# Altium PCB ADS.PcbDoc
Units mm, origin at the board's own origin, x right, y up, seen from the top; angles counter-clockwise.
Board outline 54.11 x 51.86 mm, 2 copper layers (Top Layer, Bottom Layer); 70 components, 0 nets, 317 pads, 0 vias.
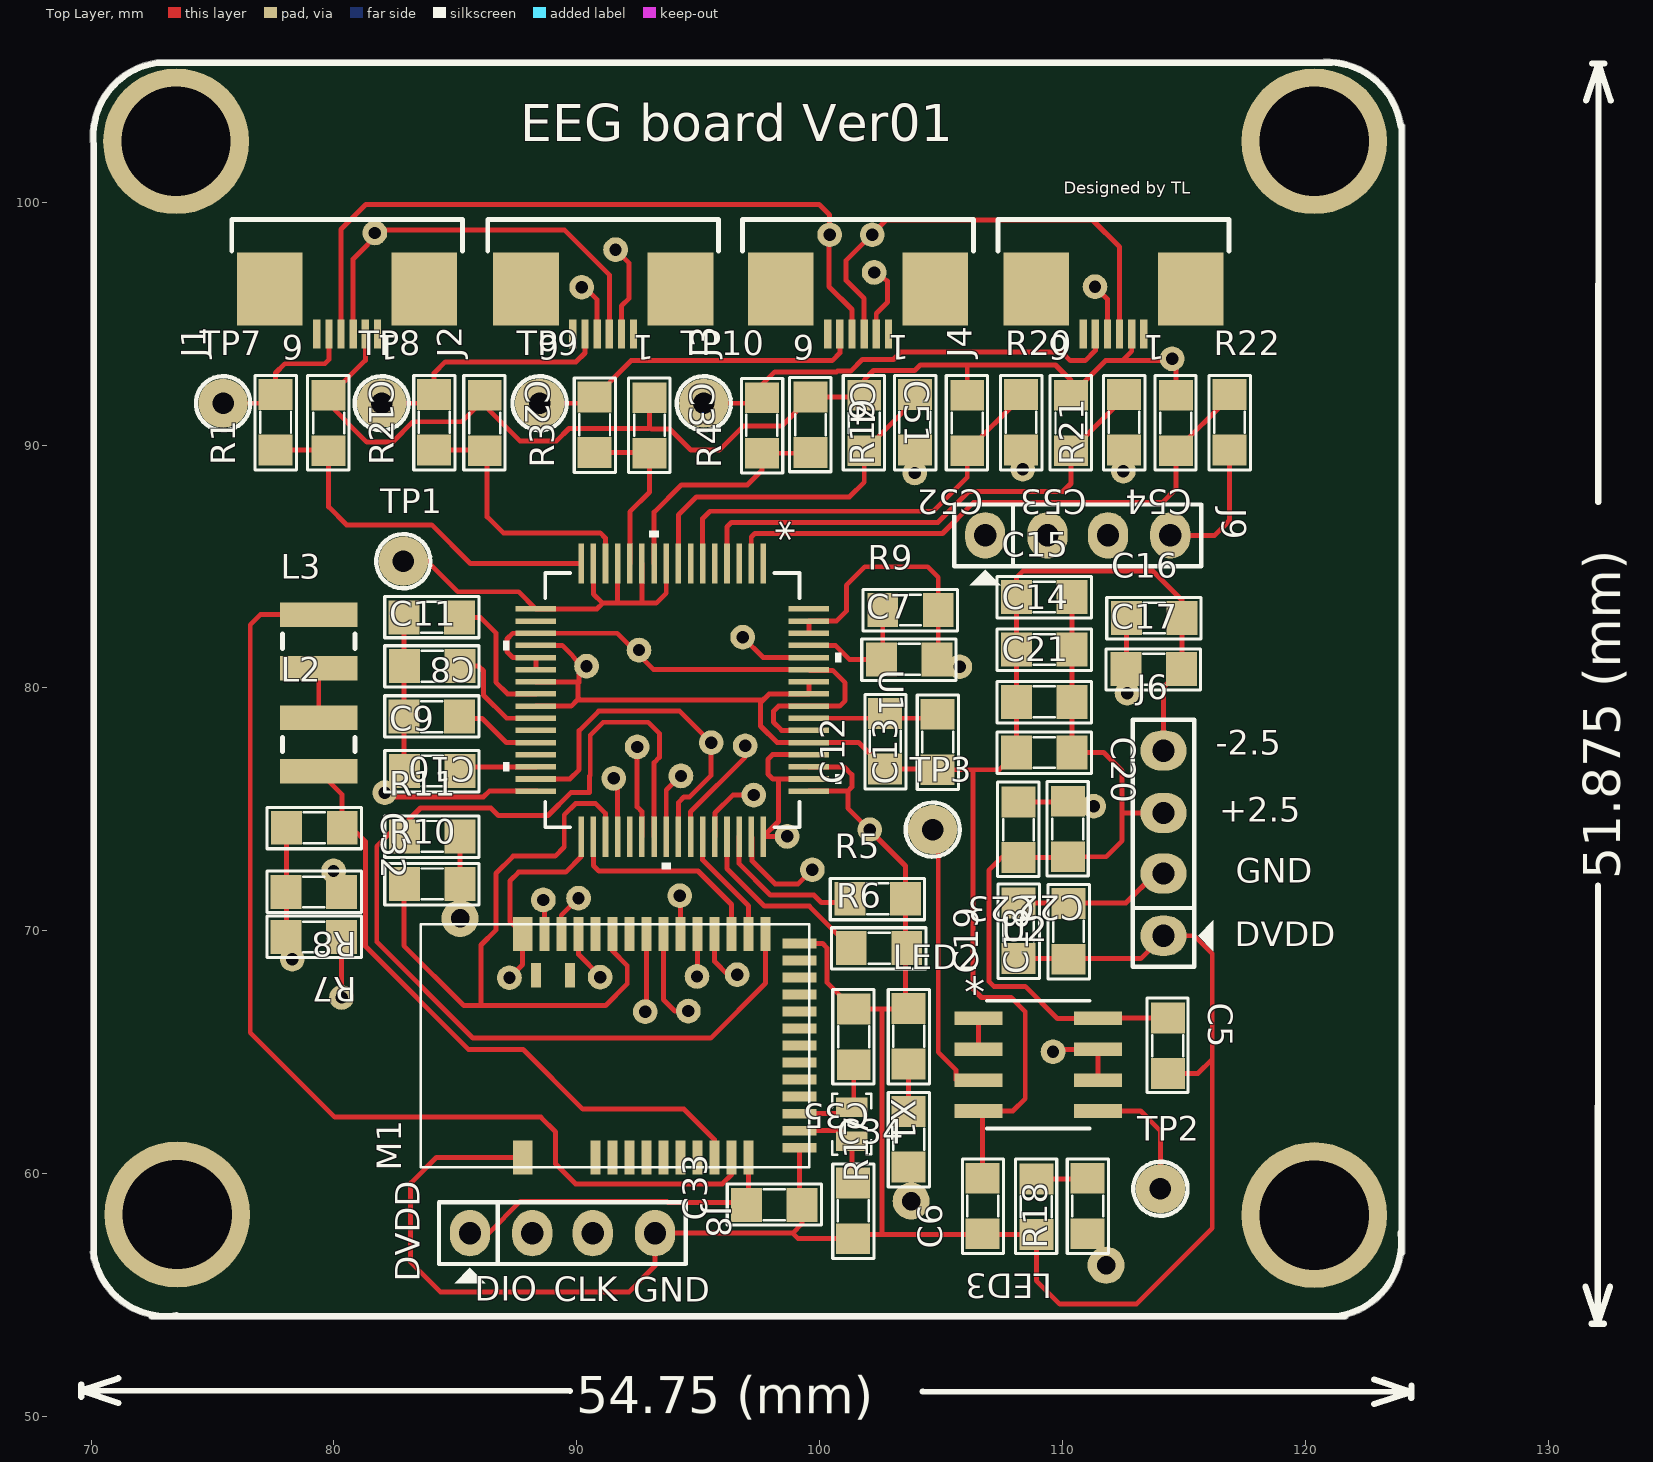
[diagram p0: Top Layer view]
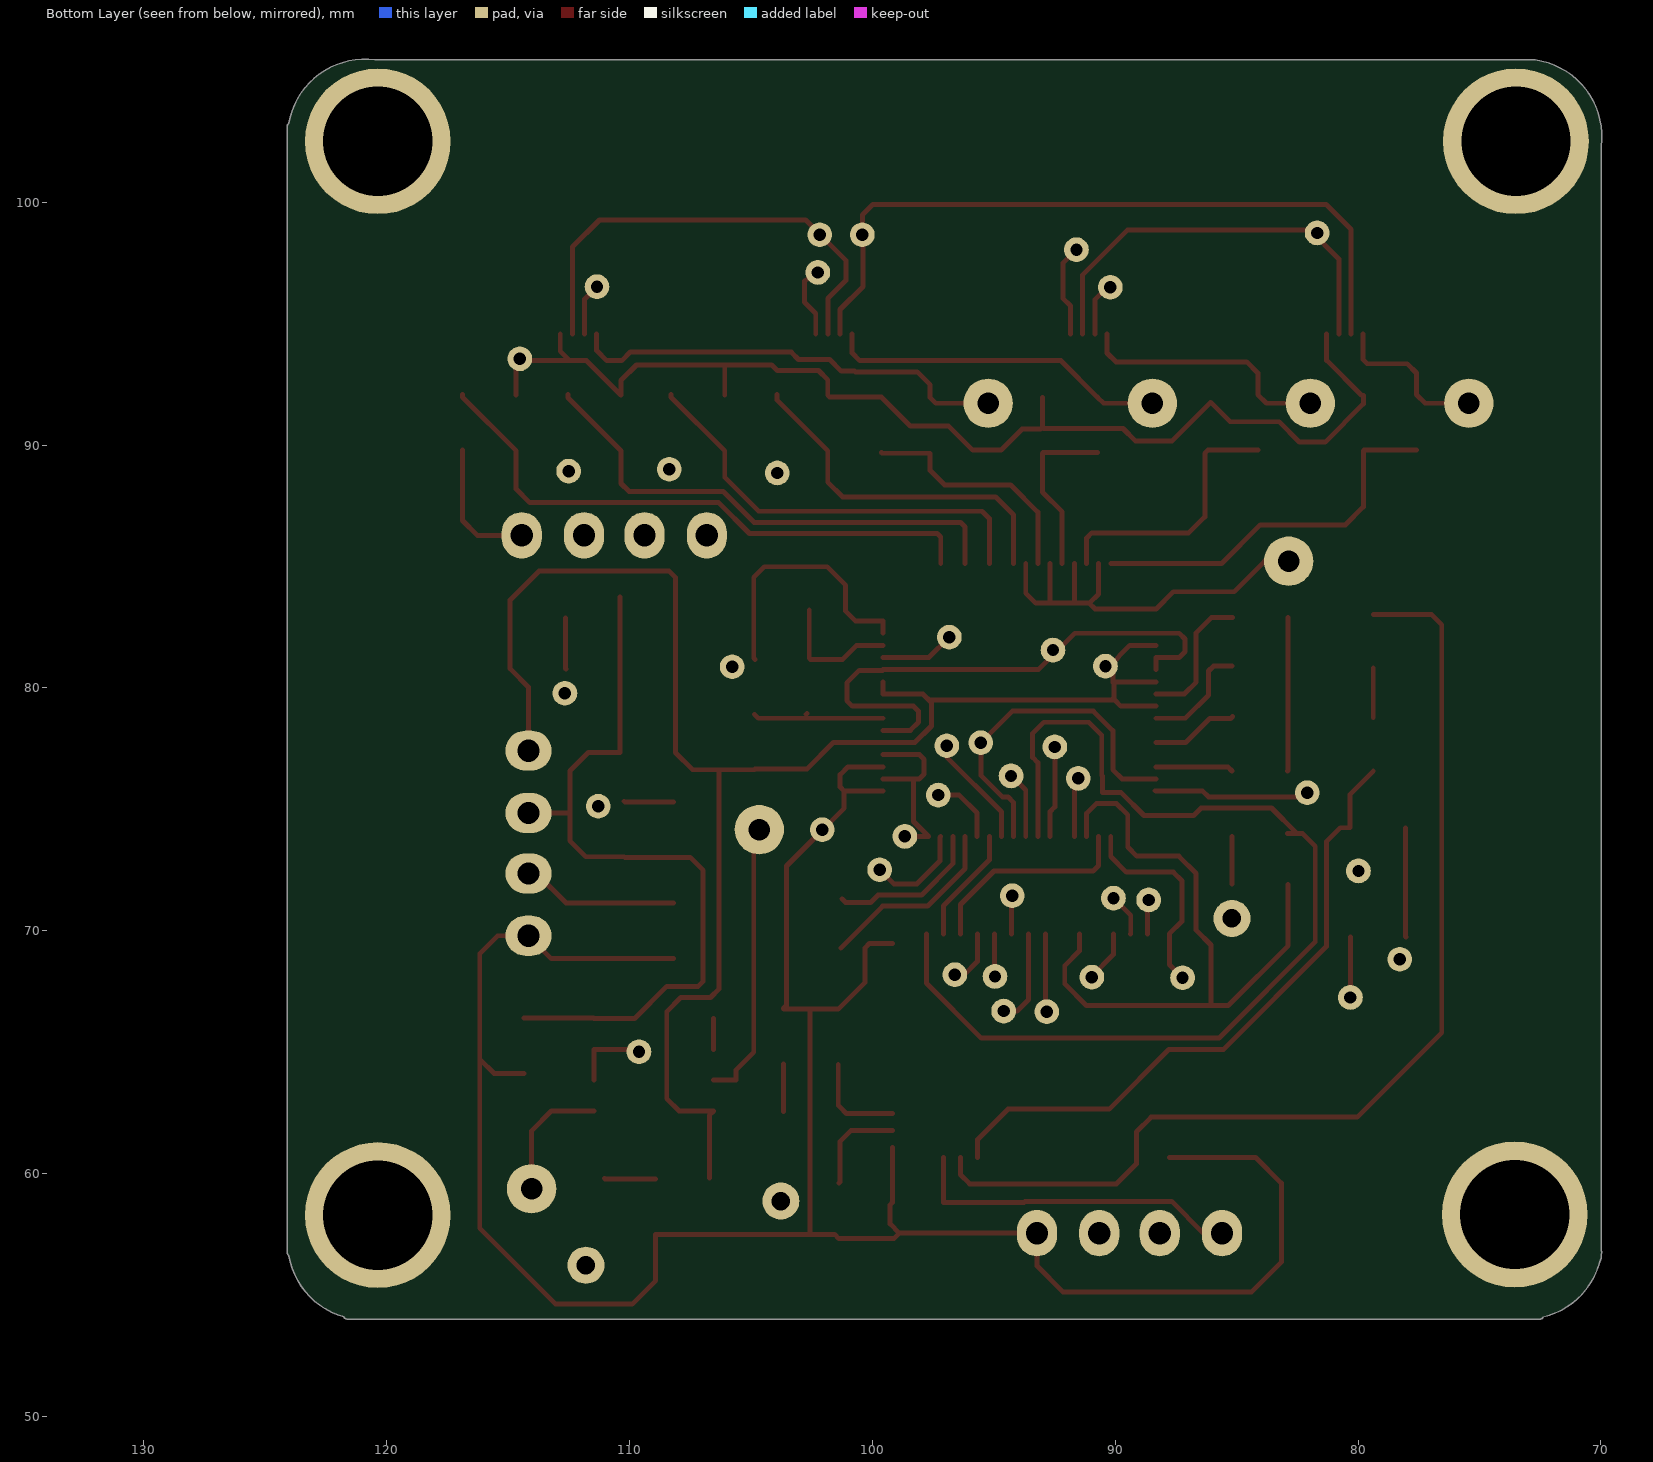
[diagram p1: Bottom Layer view, seen from below]

## Layer stack, top to bottom
Top Solder: solder mask 0.0102, Solder Resist, Dk 3.5
Top Layer: signal copper 0.0356
Dielectric 1: dielectric 0.32, FR-4, Dk 4.8
Bottom Layer: signal copper 0.0356
Bottom Solder: solder mask 0.0102, Solder Resist, Dk 3.5

## Board outline
70.035,56.435 cw(c70.125,56.525) 69.998,56.525 69.998,56.61 cw(c73.113,57.188) 69.974,56.758 cw(c70.1,56.775) 69.998,56.851 69.998,102.291 cw(c73.138,102.712) 72.708,105.851 cw(c72.725,105.725) 72.75,105.85 cw(c72.775,105.725) 72.775,105.852 120.466,105.852 cw(c120.888,102.712) 124.012,103.236 cw(c123.95,103.125) 124.077,103.125 124.077,56.75 cw(c123.95,56.75) 124.012,56.639 cw(c120.887,57.162) 121.747,54.113 cw(c121.625,54.15) 121.625,54.023 73.253,54.023 cw(c73.113,57.188) 72.972,54.023 72.5,54.023 cw(c72.5,54.15) 72.381,54.105 cw(c73.113,57.188)

## Design rules (kind name [scope] priority, off if disabled: settings)
Clearance [All] p1: gap=0.254
PolygonConnect [All] p1: connectstyle=Relief reliefconductorwidth=0.254 reliefentries=4 polygonreliefangle="90 Angle" airgapwidth=0.254
RoutingVias [All] p1: holewidth=0.711 width=1.27 viastyle="Through Hole" minholewidth=0.711 minwidth=1.27 maxholewidth=0.711 maxwidth=1.27
SolderMaskExpansion [All] p1: expansion=0.102
Width [All] p1: maxlimit=0.254 minlimit=0.254 preferedwidth=0.254
30 further rules are at their usual default settings.

## Components (designator, comment, footprint, x,y, rotation, side; value= is the part's Value field where it differs from the comment)
C1 "4.7nF" SM-0805 79.781,90.907 r270 top
C2 "4.7nF" SM-0805 86.208,90.907 r270 top
C3 "4.7nF" SM-0805 92.989,90.805 r270 top
C4 "4.7nF" SM-0805 99.619,90.83 r270 top
C5 "0.1uF" SM-0805 114.325,65.278 r270 top
C6 "0.1uF" SM-0805 106.705,58.674 r90 top
C7 "1nF" SM-0805 103.683,81.178 r0 top
C8 "10uF" SM-0805 84.023,82.906 r180 top
C9 "1uF" SM-0805 84.049,76.581 r0 top
C10 "100uF" SM-0805 84.023,78.816 r180 top
C11 "1uF" SM-0805 84.049,80.899 r0 top
C12 "1uF" SM-0805 102.692,77.8 r90 top
C13 "0.1uF" SM-0805 104.851,77.775 r90 top
C14 "1uF" SM-0805 109.245,81.585 r0 top
C15 "0.1uF" SM-0805 109.245,83.744 r0 top
C16 "1uF" SM-0805 113.767,82.88 r0 top
C17 "0.1uF" SM-0805 113.741,80.772 r0 top
C18 "1uF" SM-0805 110.236,69.977 r90 top
C19 "0.1uF" SM-0805 108.179,70.002 r90 top
C20 "1uF" SM-0805 109.245,77.343 r0 top
C21 "0.1uF" SM-0805 109.245,79.426 r0 top
C22 "1uF" SM-0805 110.211,74.193 r270 top
C23 "0.1uF" SM-0805 108.179,74.168 r270 top
C32 "1uF" SM-0805 79.197,74.244 r0 top
C33 "10uF" SM-0805 98.12,58.725 r180 top
C34 "12pF" SM-0805 101.372,58.472 r90 top
C35 "12pF" SM-0805 101.398,65.635 r270 top
C51 "4.7nF" SM-0805 101.829,90.907 r270 top
C52 "4.7nF" SM-0805 106.07,90.907 r270 top
C53 "4.7nF" SM-0805 110.338,90.907 r270 top
C54 "4.7nF" SM-0805 114.656,90.907 r270 top
J1 "Chan_01" 68710614022 80.543,97.129 r180 top
J2 "Chan_02" 68710614022 91.084,97.129 r180 top
J3 "Chan_03" 68710614022 101.575,97.129 r180 top
J4 "Chan_04" 68710614022 112.09,97.129 r180 top
J6 "Connector 4" JP4 114.148,72.339 r90 top
J8 "Loading" JP4 88.138,57.556 r0 top
J9 "Connector 4" JP4 109.347,86.284 r0 top
L2 "10 uH, 1 A" WE-TPC_2828 79.375,77.673 r0 top
L3 "15 uH, 0.72 A" WE-TPC_2828 79.375,81.915 r0 top
LED2 "LED" SM-0805 103.657,65.659 r90 top
LED3 "LED" SM-0805 108.915,58.649 r270 top
M1 "MODULE_MDBT42Q" PCB_MDBT42Q_10X16 83.566,65.278 r90 top
R1 "4.99k" SM-0805 77.597,90.932 r90 top
R2 "4.99k" SM-0805 84.125,90.932 r90 top
R3 "4.99k" SM-0805 90.729,90.83 r90 top
R4 "4.99k" SM-0805 97.612,90.805 r90 top
R5 "10k" SM-0805 102.387,71.323 r0 top
R6 "10k" SM-0805 102.438,69.291 r0 top
R7 "10k" SM-0805 79.172,69.748 r180 top
R8 "10k" SM-0805 79.172,71.603 r180 top
R9 "499k, 01%" SM-0805 103.734,83.21 r0 top
R10 "10k" SM-0805 84.049,71.933 r0 top
R11 "10k" SM-0805 84.049,73.889 r0 top
R17 "1k" SM-0805 103.657,61.417 r90 top
R18 "1k" SM-0805 111.023,58.674 r90 top
R19 "4.99k" SM-0805 103.911,90.932 r90 top
R20 "4.99k" SM-0805 108.28,90.932 r90 top
R21 "4.99k" SM-0805 112.522,90.932 r90 top
R22 "4.99k" SM-0805 116.865,90.932 r90 top
TP1 "TP" TP1 82.855,85.217 r0 top
TP2 "TP" TP1 114.021,59.385 r0 top
TP3 "TP" TP1 104.648,74.168 r0 top
TP7 "TP" TP1 75.438,91.719 r0 top
TP8 "TP" TP1 81.966,91.719 r0 top
TP9 "TP" TP1 88.468,91.719 r0 top
TP10 "TP" TP1 95.225,91.719 r90 top
U1 "Part Number: ADS1299IPAGR" PAG64 93.929,79.502 r270 top
U2 "OPA2376AIDR" D8 108.991,64.491 r0 top
X1 "32.768kHz" "Crystal 32.768kHz SMD" 101.321,62.841 r270 top

## Footprints (in the part's own frame and the unit in brackets; to place one, negate y for a bottom-side part, rotate by r counter-clockwise, add the part's x,y. Pads: shape width x height; smd on the part's side, far side on the other; paste and mask are expansions set on the pad)
68710614022 [mm] "ZIF Connectors, Horizontal, Top Contact, pitch 0.5mm, 6p"
  rect 0.3x1.2 smd: 1(-1.25,2.56) 2(-0.75,2.56) 3(-0.25,2.56) 4(0.25,2.56) 5(0.75,2.56) 6(1.25,2.56)
  rect 2.7x3 smd: MH1(-3.18,0.7) MH2(3.18,0.7)
  silkscreen extent -4.75,-2.15 4.75,-0.85, body extent -4.7,-2.15 4.7,2.95, height 2.1
"Crystal 32.768kHz SMD" [mm] "XT"
  rect 0.8x1.3 smd: 1(0.1,0) 2(1.5,0)
  silkscreen extent -0.45,-0.8 2.05,0.8
D8 [mil]
  rect 78x22 smd paste+0 mask+0: 1(-97,75) 2(-97,25) 3(-97,-25) 4(-97,-75) 5(97,-75) 6(97,-25) 7(97,25) 8(97,75)
  silkscreen extent -84,-104 84,104, body extent 0,0 10,10, height 10
JP4 [mil] "Jumper 4"
  oval 65x75 hole 36: 1(-100,0) 2(1,0) 3(99,0) 4(200,0)
  silkscreen extent -150,-81 250,50, body extent -148,-48 248,50, height 323
PAG64 [mil]
  rect 65.5x9 smd paste+0 mask+0: 1(-221.25,147.64) 2(-221.25,127.95) 3(-221.25,108.27) 4(-221.25,88.58) 5(-221.25,68.9) 6(-221.25,49.21) 7(-221.25,29.53) 8(-221.25,9.84) 9(-221.25,-9.84) 10(-221.25,-29.53) 11(-221.25,-49.21) 12(-221.25,-68.9) 13(-221.25,-88.58) 14(-221.25,-108.27) 15(-221.25,-127.95) 16(-221.25,-147.64) 33(221.25,-147.64) 34(221.25,-127.95) 35(221.25,-108.27) 36(221.25,-88.58) 37(221.25,-68.9) 38(221.25,-49.21) 39(221.25,-29.53) 40(221.25,-9.84) 41(221.25,9.84) 42(221.25,29.53) 43(221.25,49.21) 44(221.25,68.9) 45(221.25,88.58) 46(221.25,108.27) 47(221.25,127.95) 48(221.25,147.64)
  rect 9x65.5 smd paste+0 mask+0: 17(-147.64,-221.25) 18(-127.95,-221.25) 19(-108.27,-221.25) 20(-88.58,-221.25) 21(-68.9,-221.25) 22(-49.21,-221.25) 23(-29.53,-221.25) 24(-9.84,-221.25) 25(9.84,-221.25) 26(29.53,-221.25) 27(49.21,-221.25) 28(68.9,-221.25) 29(88.58,-221.25) 30(108.27,-221.25) 31(127.95,-221.25) 32(147.64,-221.25) 49(147.64,221.25) 50(127.95,221.25) 51(108.27,221.25) 52(88.58,221.25) 53(68.9,221.25) 54(49.21,221.25) 55(29.53,221.25) 56(9.84,221.25) 57(-9.84,221.25) 58(-29.53,221.25) 59(-49.21,221.25) 60(-68.9,221.25) 61(-88.58,221.25) 62(-108.27,221.25) 63(-127.95,221.25) 64(-147.64,221.25)
  silkscreen extent -274,-274 274,274, body extent 0,0 10,10, height 10
PCB_MDBT42Q_10X16 [mm]
  rect 1.4x0.8 smd mask+0: 1(-4.6,-4.2) 39(4.6,-4.2)
  rect 1.4x0.4 smd mask+0: 2(-4.6,-7.2) 3(-4.6,-7.9) 5(-4.6,-9.3) 6(-4.6,-10) 7(-4.6,-10.7) 8(-4.6,-11.4) 9(-4.6,-12.1) 10(-4.6,-12.8) 11(-4.6,-13.5) 25(4.6,-14.2) 26(4.6,-13.5) 27(4.6,-12.8) 28(4.6,-12.1) 29(4.6,-11.4) 30(4.6,-10.7) 31(4.6,-10) 32(4.6,-9.3) 33(4.6,-8.6) 34(4.6,-7.9) 35(4.6,-7.2) 36(4.6,-6.5) 37(4.6,-5.8) 38(4.6,-5.1)
  rect 1.4x0.4 smd: 4(-4.6,-8.6)
  rect 0.4x1.4 smd mask+0: 12(-4.2,-15.6) 13(-3.5,-15.6) 14(-2.8,-15.6) 15(-2.1,-15.6) 16(-1.4,-15.6) 17(-0.7,-15.6) 18(0,-15.6) 19(0.7,-15.6) 20(1.4,-15.6) 21(2.1,-15.6) 22(2.8,-15.6) 23(3.5,-15.6) 24(4.2,-15.6)
  rect 1x0.4 smd mask+0: 40(2.9,-4.75) 41(2.9,-6.15)
  silkscreen extent -5,-16 5,0
SM-0805 [mil] "Compoment SMD 80x50mil"
  rect 50x55 smd: 1(-45,0) 2(45,0)
  silkscreen extent -77,-34 76,33, body extent -40,-25 40,25, height 24
TP1 [mil] "Test point"
  round 80 hole 35: 1(0,0)
  silkscreen extent -44,-44 44,44
WE-TPC_2828 [mm] "Power Inductor, SMD, 2-Leads, body 2.8x2.8mm"
  rect 3.2x1 smd: 1(0,1.1) 2(0,-1.1)
  silkscreen extent -1.49,-0.3 1.49,0.3, body extent -1.4,-1.4 1.4,1.4, height 2.82

## Part data
C1 C2 C3 C4 C5 C6 C7 C8 C9 C10 C11 C12 C13 C14 C15 C16 C17 C18 C19 C20 C21 C22 C23 C32 C33 C34 C35 C51 C52 C53 C54: library part CM, "Cap SMD"
J1 J2 J3 J4: library part 68710614022, "ZIF Connectors WR-FPC, Horizontal, Top Contact, pitch 0.5mm, 6pin"
J6 J9: library part JP4
J8: library part JP4, "Connector 4"
L2: library part 744025100, "SMT Shielded Tiny Power Inductor WE-TPC, size 2828, 10 uH, 1 A"
L3: library part 744025150, "SMT Shielded Tiny Power Inductor WE-TPC, size 2828, 15 uH, 0.72 A"
LED2 LED3: "LED Single colour Green and Red"
M1: "MDBT42Q"
R1 R2 R3 R4 R5 R6 R7 R8 R9 R10 R11 R17 R18 R19 R20 R21 R22: library part R, "Resistor 1/4W"
TP1 TP2 TP3 TP7 TP8 TP9 TP10: library part TP1, "Test Point"
U1: library part ADS1299IPAGR, "No Description Available"
U2: "No Description Available"
X1: library part Crystal, "Crystal For all Crystal 2pin."

## Free pads (board coordinates)
  round 1.016 hole 0.508: 6(78.283,68.834) 6(79.985,72.466) 6(80.315,67.259) 6(81.686,98.73) 6(82.093,75.692) 6(87.224,68.072) 6(88.621,71.272) 6(90.068,71.349) 6(90.195,96.495) 6(90.399,80.899) 6(90.957,68.097) 6(91.516,76.276) 6(91.592,98.044) 6(92.481,77.572) 6(92.558,81.559) 6(92.812,66.675) 6(94.234,71.45) 6(94.285,76.378) 6(94.59,66.7) 6(94.945,68.123) 6(95.529,77.749) 6(96.596,68.199) 6(96.825,82.093) 6(96.926,77.622) 6(97.282,75.59) 6(98.654,73.889) 6(99.695,72.517) 6(100.406,98.654) 6(102.057,74.168) 6(102.159,98.654) 6(102.235,97.104) 6(103.911,88.849) 6(105.766,80.874) 6(108.356,89.002) 6(109.601,65.024) 6(111.277,75.133) 6(111.328,96.52) 6(112.497,88.925) 6(112.649,79.781) 6(114.503,93.548)
  round 1.524 hole 0.762: 7(103.759,58.877) 8(111.785,56.236) 9(85.192,70.51)
  round 6 hole 4.5: 10(73.5,102.5) 10(73.55,58.325) 10(120.35,58.3) 10(120.35,102.5)

## Nets (pads, with @x,y where several pads share a name; then routed paths per layer and width w, separated by ;. In a path a pad name is that pad's centre, name@x,y a point inside that pad or via, vN(x,y) a via of type N, cw(c..) or ccw(c..) an arc to the next point about the centre after c; other vN are vias at no path point)
pads on no net: C1.1 C1.2 C2.1 C2.2 C3.1 C3.2 C4.1 C4.2 C5.1 C5.2 C6.1 C6.2 C7.1 C7.2 C8.1 C8.2 C9.1 C9.2 C10.1 C10.2 C11.1 C11.2 C12.1 C12.2 C13.1 C13.2 C14.1 C14.2 C15.1 C15.2 C16.1 C16.2 C17.1 C17.2 C18.1 C18.2 C19.1 C19.2 C20.1 C20.2 C21.1 C21.2 C22.1 C22.2 C23.1 C23.2 C32.1 C32.2 C33.1 C33.2 C34.1 C34.2 C35.1 C35.2 C51.1 C51.2 C52.1 C52.2 C53.1 C53.2 C54.1 C54.2 J1.1 J1.2 J1.3 J1.4 J1.5 J1.6 J1.MH1 J1.MH2 J2.1 J2.2 J2.3 J2.4 J2.5 J2.6 J2.MH1 J2.MH2 J3.1 J3.2 J3.3 J3.4 J3.5 J3.6 J3.MH1 J3.MH2 J4.1 J4.2 J4.3 J4.4 J4.5 J4.6 J4.MH1 J4.MH2 J6.1 J6.2 J6.3 J6.4 J8.1 J8.2 J8.3 J8.4 J9.1 J9.2 J9.3 J9.4 L2.1 L2.2 L3.1 L3.2 LED2.1 LED2.2 LED3.1 LED3.2 M1.1 M1.2 M1.3 M1.4 M1.5 M1.6 M1.7 M1.8 M1.9 M1.10 M1.11 M1.12 M1.13 M1.14 M1.15 M1.16 M1.17 M1.18 M1.19 M1.20 M1.21 M1.22 M1.23 M1.24 M1.25 M1.26 M1.27 M1.28 M1.29 M1.30 M1.31 M1.32 M1.33 M1.34 M1.35 M1.36 M1.37 M1.38 M1.39 M1.40 M1.41 R1.1 R1.2 R2.1 R2.2 R3.1 R3.2 R4.1 R4.2 R5.1 R5.2 R6.1 R6.2 R7.1 R7.2 R8.1 R8.2 R9.1 R9.2 R10.1 R10.2 R11.1 R11.2 R17.1 R17.2 R18.1 R18.2 R19.1 R19.2 R20.1 R20.2 R21.1 R21.2 R22.1 R22.2 TP1.1 TP2.1 TP3.1 TP7.1 TP8.1 TP9.1 TP10.1 U1.1 U1.2 U1.3 U1.4 U1.5 U1.6 U1.7 U1.8 U1.9 U1.10 U1.11 U1.12 U1.13 U1.14 U1.15 U1.16 U1.17 U1.18 U1.19 U1.20 U1.21 U1.22 U1.23 U1.24 U1.25 U1.26 U1.27 U1.28 U1.29 U1.30 U1.31 U1.32 U1.33 U1.34 U1.35 U1.36 U1.37 U1.38 U1.39 U1.40 U1.41 U1.42 U1.43 U1.44 U1.45 U1.46 U1.47 U1.48 U1.49 U1.50 U1.51 U1.52 U1.53 U1.54 U1.55 U1.56 U1.57 U1.58 U1.59 U1.60 U1.61 U1.62 U1.63 U1.64 U2.1 U2.2 U2.3 U2.4 U2.5 U2.6 U2.7 U2.8 X1.1 X1.2
copper on no net: | length 915.9
  Top Layer w0.203: 75.438,91.719 77.241,91.719 77.597,92.075 77.597,92.964 77.978,93.345 79.629,93.345 79.793,93.509 79.793,94.569 ; 77.597,89.789 79.756,89.789 ; 78.029,69.748 78.054,69.774 78.054,74.244 ; 79.375,76.573 80.34,75.608 80.34,74.244 80.733,74.244 81.305,73.672 81.305,69.356 85.536,65.126 87.782,65.126 90.246,62.662 94.412,62.662 95.666,61.408 95.666,60.678 ; 79.375,78.773 79.375,80.815 ; 79.375,83.015 76.97,83.015 76.556,82.601 76.556,65.811 80.035,62.332 88.519,62.332 89.129,61.722 89.129,60.401 89.941,59.588 95.987,59.588 96.366,59.968 96.366,60.678 ; 79.781,89.764 79.781,87.452 80.518,86.716 84.023,86.716 85.617,85.122 90.179,85.122 ; 80.293,94.569 80.293,98.882 81.309,99.898 99.974,99.898 100.406,99.466 100.406,98.654 100.381,98.628 100.381,96.52 101.325,95.576 101.325,94.569 ; 80.315,67.259 80.315,69.748 ; 80.793,94.569 80.793,97.659 81.991,98.857 89.484,98.857 91.334,97.006 91.334,94.569 ; 81.293,94.569 81.293,93.485 79.858,92.05 79.781,92.05 79.781,91.694 81.356,90.119 82.41,90.119 83.248,90.957 85.268,90.957 86.068,91.757 87.655,90.17 89.167,90.17 89.675,90.678 92.938,90.678 92.989,90.729 ; 81.966,91.719 83.769,91.719 84.125,92.075 84.125,92.964 84.582,93.421 89.967,93.421 90.334,93.789 90.334,94.569 ; 82.093,75.692 82.271,75.514 86.157,75.514 86.395,75.752 88.309,75.752 88.326,75.768 88.367,75.768 ; 82.55,74.041 83.566,75.057 86.462,75.057 86.766,74.752 88.812,74.752 89.752,75.692 90.526,75.692 90.526,76.373 90.551,76.398 90.551,78.054 91.084,78.588 92.939,78.588 93.396,78.13 93.396,77.14 93.179,76.923 93.179,73.882 ; 82.855,85.217 83.845,85.217 85.103,83.96 87.602,83.96 88.309,83.252 90.821,83.252 91.059,83.49 ; 82.88,71.907 82.88,69.392 85.343,66.929 86.055,66.929 ; 82.88,82.906 82.88,78.816 82.88,76.606 82.906,76.581 ; 82.906,74.016 82.296,74.016 81.763,73.482 81.763,69.545 85.725,65.583 95.504,65.583 97.765,67.843 97.765,68.656 97.766,68.658 97.766,69.878 ; 84.125,89.789 86.182,89.789 86.208,89.764 86.309,89.662 86.309,87.046 86.97,86.385 90.957,86.385 91.179,86.164 91.179,85.122 ; 85.166,78.816 85.242,78.74 86.106,78.74 87.094,77.752 88.309,77.752 ; 85.166,82.906 86.03,82.906 86.665,82.271 86.665,80.239 87.151,79.752 88.309,79.752 ; 85.192,71.933 85.192,73.889 ; 85.192,76.581 85.363,76.752 88.309,76.752 ; 85.192,80.899 85.954,80.899 86.157,80.696 86.157,79.705 87.11,78.752 88.309,78.752 ; 85.598,57.556 86.366,57.556 87.674,58.864 93.707,58.864 93.758,58.814 97.066,58.814 97.066,60.678 ; 87.224,68.072 87.76,68.609 87.76,69.872 87.766,69.878 87.249,70.395 87.249,72.06 87.605,72.415 89.535,72.415 90.179,73.06 90.179,73.882 ; 87.766,60.678 84.224,60.678 83.16,59.614 83.16,56.363 84.379,55.143 92.151,55.143 93.218,56.21 93.218,57.556 98.882,57.556 ; 88.309,76.252 89.714,76.252 90.094,76.632 90.094,78.244 90.895,79.045 94.234,79.045 95.529,77.749 95.529,76.401 94.643,75.514 94.412,75.514 94.179,75.282 94.179,73.882 ; 88.309,79.252 89.768,79.252 90.018,79.502 90.145,79.502 ; 88.309,80.252 90.055,80.252 ; 88.309,80.752 88.309,81.252 87.36,81.252 87.122,81.49 87.122,82.014 87.36,82.252 88.309,82.252 91.662,82.252 93.162,80.752 99.549,80.752 99.579,80.722 100.528,80.722 101.041,80.209 101.041,79.477 100.817,79.252 99.549,79.252 98.302,79.252 98.095,79.045 98.095,78.588 98.43,78.252 99.549,78.252 ; 88.309,81.752 89.399,81.752 89.789,81.362 90.094,80.983 90.094,80.213 90.055,80.252 ; 88.468,91.719 90.475,91.719 90.729,91.973 92.227,93.472 100.508,93.472 100.825,93.789 100.825,94.569 ; 88.621,71.272 88.666,71.227 88.666,69.878 ; 89.366,69.878 89.357,69.887 89.357,70.637 90.068,71.349 ; 90.066,69.878 90.066,69.031 90.957,68.139 90.957,68.097 ; 90.348,96.469 90.834,95.982 90.834,94.569 ; 90.679,73.882 90.679,72.694 90.907,72.466 94.984,72.466 96.366,71.085 96.366,69.878 ; 90.679,85.122 90.679,83.87 91.059,83.49 ; 90.729,89.687 92.964,89.687 92.989,89.662 92.989,88.062 92.179,87.252 92.179,85.122 ; 91.179,73.882 91.179,74.831 91.126,74.884 90.776,75.235 89.941,75.235 89.48,74.774 89.48,73.453 89.103,73.076 87.376,73.076 86.665,72.365 86.665,70.028 86.055,69.418 86.055,66.929 ; 91.466,69.878 91.466,69.175 92.075,68.566 92.075,67.818 91.186,66.929 86.055,66.929 ; 91.516,76.276 91.679,76.113 91.679,73.882 ; 91.592,98.044 92.151,97.485 92.151,96.037 91.834,95.721 91.834,94.569 ; 91.679,85.122 91.679,83.505 91.694,83.49 ; 92.481,77.572 92.481,75.108 92.679,74.91 92.679,73.882 ; 92.679,85.122 92.679,83.495 92.685,83.49 ; 92.812,66.675 92.866,66.729 92.866,69.878 ; 92.989,91.948 92.989,90.729 ; 93.179,85.122 93.179,87.236 94.299,88.355 97.016,88.355 97.612,88.951 97.612,89.662 99.593,89.662 99.619,89.687 ; 93.566,69.878 93.566,67.165 94.031,66.7 94.59,66.7 ; 93.679,73.882 93.679,75.798 94.154,76.273 ; 93.679,85.122 93.679,83.9 93.269,83.49 92.685,83.49 ; 94.179,85.122 94.179,87.118 94.92,87.859 101.219,87.859 101.829,88.468 101.829,89.764 103.911,91.846 103.911,92.075 ; 94.234,71.45 94.266,71.418 94.266,69.878 ; 94.679,73.882 94.679,74.904 96.926,77.152 96.926,77.622 ; 94.945,68.123 94.966,68.144 94.966,69.878 ; 95.179,73.882 95.179,72.918 97.066,71.031 97.066,69.878 ; 95.179,85.122 95.179,86.975 95.479,87.274 104.673,87.274 106.07,88.671 106.07,89.764 108.28,91.973 108.28,92.075 ; 95.225,91.719 97.384,91.719 97.612,91.948 97.612,92.481 98.146,93.015 100.697,93.015 100.723,93.04 101.27,93.04 101.752,93.523 103.034,93.523 103.33,93.819 103.33,93.831 109.953,93.831 110.312,93.472 110.922,93.472 111.34,93.89 111.34,94.569 ; 95.666,69.878 95.666,68.748 96.215,68.199 96.596,68.199 ; 95.679,73.882 95.679,74.851 96.418,75.59 97.282,75.59 ; 96.179,73.882 96.179,72.565 97.725,71.018 99.568,71.018 101.295,69.291 ; 96.179,85.122 96.179,86.629 96.368,86.817 104.863,86.817 106.133,88.087 110.007,88.087 110.338,88.417 110.338,89.764 112.522,91.948 112.522,92.075 ; 96.679,73.882 96.679,72.764 97.968,71.476 99.757,71.476 100.062,71.171 101.092,71.171 101.244,71.323 ; 96.825,82.093 97.666,81.252 99.549,81.252 ; 97.179,73.882 97.209,73.852 97.209,72.881 98.157,71.933 99.111,71.933 99.695,72.517 ; 97.179,85.122 97.179,86.212 97.328,86.36 105.052,86.36 106.322,87.63 114.097,87.63 114.656,88.189 114.656,89.764 116.865,91.973 116.865,92.075 ; 97.561,79.4 97.913,79.752 99.549,79.752 99.549,80.252 ; 98.654,73.889 98.647,73.882 97.679,73.882 98.298,74.501 98.298,76.252 ; 99.166,61.078 99.166,58.822 99.263,58.725 99.263,57.937 98.882,57.556 ; 99.166,61.778 100.884,61.778 101.321,61.341 101.321,59.667 101.372,59.615 ; 99.166,62.478 101.058,62.478 101.321,62.741 101.398,62.818 101.398,64.492 ; 99.166,69.478 100.118,69.478 100.305,69.291 100.305,67.871 101.398,66.778 102.565,66.778 ; 99.549,75.752 101.152,75.752 ; 99.549,76.252 98.298,76.252 ; 99.549,76.752 100.997,76.752 101.321,76.429 101.321,75.921 101.152,75.752 ; 99.549,77.252 98.055,77.252 97.866,77.064 97.866,76.454 98.068,76.252 98.298,76.252 ; 99.549,78.752 104.685,78.752 104.851,78.918 ; 99.549,81.752 100.639,81.752 101.212,81.178 102.54,81.178 102.591,81.229 102.591,83.21 ; 99.549,82.252 99.549,82.752 100.684,82.752 101.092,83.16 101.092,84.226 101.854,84.988 104.445,84.988 104.877,84.557 104.877,83.21 104.877,81.229 104.826,81.178 ; 101.825,94.569 101.825,96.033 101.084,96.774 101.084,97.604 102.743,99.263 111.227,99.263 112.34,98.149 112.34,94.569 ; 102.235,97.104 102.794,96.749 102.794,95.885 102.325,95.416 102.325,94.569 ; 102.692,78.943 102.718,78.918 ; 103.657,62.56 103.657,64.516 ; 104.597,73.635 104.877,73.355 104.877,65.004 105.613,64.267 105.613,63.856 106.528,63.856 ; 106.07,92.05 106.07,93.269 106.096,93.294 ; 106.299,76.632 106.299,67.615 106.655,67.259 107.874,67.259 108.458,66.675 108.458,63.094 107.95,62.586 106.528,62.586 106.705,62.408 106.705,59.817 ; 106.528,65.126 106.528,66.396 ; 108.179,68.859 113.208,68.859 114.148,69.799 115.418,69.799 116.154,69.063 116.154,64.719 ; 108.179,71.145 112.598,71.145 113.817,72.365 114.148,72.365 ; 108.179,75.311 110.185,75.311 110.211,75.336 ; 108.915,59.792 110.998,59.792 111.023,59.817 ; 109.601,65.024 109.703,65.126 111.455,65.126 111.455,63.856 ; 110.388,83.744 110.388,81.585 110.388,79.426 110.388,77.343 111.684,77.343 112.446,76.581 112.446,73.711 111.785,73.05 110.211,73.05 110.185,73.025 108.179,73.025 107.493,73.025 106.959,72.492 106.959,67.92 107.163,67.716 108.458,67.716 109.779,66.396 111.455,66.396 111.481,66.421 114.325,66.421 ; 111.328,96.52 111.84,96.008 111.84,94.569 ; 111.455,62.586 113.208,62.586 114.021,61.773 114.021,59.385 ; 112.497,74.854 114.148,74.854 ; 112.598,80.772 112.624,80.797 112.624,82.88 ; 112.84,94.569 112.84,93.866 112.446,93.472 ; 114.148,77.419 114.148,80.035 114.884,80.772 114.91,80.797 114.91,82.88 114.91,83.617 113.716,84.811 108.356,84.811 108.102,84.557 108.102,83.744 108.102,81.585 108.102,79.426 108.102,77.343 107.391,76.632 104.851,76.632 104.826,76.657 102.692,76.657 101.597,77.752 99.549,77.752 98.245,77.752 97.561,78.435 97.561,79.502 90.145,79.502 ; 114.325,64.135 115.57,64.135 116.154,64.719 ; 114.427,86.284 116.256,86.284 116.865,86.893 116.865,89.789 ; 114.656,92.05 114.656,93.116 114.3,93.472 112.446,93.472 ; 90.055,80.252 90.055,79.592 90.145,79.502 ; 91.059,83.49 91.694,83.49 ; 91.694,83.49 92.685,83.49 ; 92.989,90.729 93.066,90.652 93.835,90.652 94.699,89.789 95.86,89.789 96.85,90.78 98.425,90.78 99.619,91.973 101.752,91.973 101.829,92.05 101.829,92.685 102.21,93.066 103.906,93.066 104.134,93.294 106.096,93.294 ; 98.882,57.556 99.109,57.329 101.372,57.329 101.549,57.506 102.565,57.506 ; 101.152,75.752 101.152,75.048 103.53,72.669 103.53,71.323 103.53,66.929 103.657,66.802 103.633,66.778 102.565,66.778 ; 102.565,57.506 102.565,66.778 ; 102.565,57.506 108.915,57.506 108.915,55.601 109.88,54.635 113.03,54.635 116.154,57.76 116.154,64.719 ; 106.096,93.294 109.703,93.294 110.338,92.659 110.338,92.05 111.76,93.472 112.446,93.472

## Silkscreen, mask and mechanical layers (free items; w line width, h text height)
Top Overlay:
  lines w0.254: 69.6,50.821 69.6,51.329 ; 70.1,56.775 ccw(c73.113,57.188) 73.525,54.175 ; 70.125,56.525 70.125,102.3 cw(c73.138,102.712) 72.725,105.725 ; 71.124,50.566 69.6,51.075 ; 71.124,51.582 69.6,51.075 ; 72.5,54.15 121.625,54.15 ; 72.775,105.725 121.05,105.725 ; 89.713,51.057 69.6,51.075 ; 104.237,51.043 124.35,51.025 ; 120.475,105.725 cw(c120.888,102.712) 123.9,103.125 ; 121.3,54.15 ccw(c120.887,57.162) 123.9,57.575 ; 122.826,50.518 124.35,51.025 ; 122.826,51.534 124.35,51.025 ; 123.95,56.75 123.95,103.125 ; 124.35,50.771 124.35,51.279 ; 131.518,55.349 132.025,53.825 ; 131.541,104.176 132.05,105.7 ; 131.771,53.825 132.279,53.825 ; 131.796,105.7 132.304,105.7 ; 132.034,71.866 132.025,53.825 ; 132.041,87.659 132.05,105.7 ; 132.534,55.349 132.025,53.825 ; 132.557,104.176 132.05,105.7
  text "EEG board Ver01" at 87.675,102.5 h1.52
  text "Designed by TL" at 110.05,100.35 h0.5
  text "-2.5" at 116.3,77.25 h1
  text "+2.5" at 116.45,74.5 h1
  text "51.875 (mm)" at 132.948,72.119 h1.52 r89.97
  text "GND" at 117.125,71.975 h1
  text "DVDD" at 117.075,69.375 h1
  text "DVDD" at 83.525,55.55 h1 r90
  text "DIO" at 85.8,54.775 h1
  text "CLK" at 89.05,54.75 h1
  text "GND" at 92.325,54.725 h1
  text "54.75 (mm)" at 89.966,50.142 h1.52 r359.95

## Text inside footprints (layer, text, board x,y; h text height)
J1: Top Overlay "6" at 78.743,94.519 h1 r180; Top Overlay "1" at 82.643,94.519 h1 r180
J2: Top Overlay "6" at 89.284,94.519 h1 r180; Top Overlay "1" at 93.184,94.519 h1 r180
J3: Top Overlay "6" at 99.775,94.519 h1 r180; Top Overlay "1" at 103.675,94.519 h1 r180
J4: Top Overlay "6" at 110.29,94.519 h1 r180; Top Overlay "1" at 114.19,94.519 h1 r180
M1: Mechanical 2 "No ground pad" at 85.456,62.663 h0.45 r90; Mechanical 3 "Toplayer no ground pad" at 91.341,62.478 h0.3 r90
U1: Top Overlay "*" at 97.675,86.906 h1.27 r270; Mechanical 13 "*" at 97.294,84.544 h1.27 r270
U2: Top Overlay "*" at 105.956,66.827 h1.27; Mechanical 13 "*" at 107.061,65.646 h1.27